# Altium PCB 电机控制器.PcbDoc (part 2 of 2)
Units mm, origin at the board's own origin, x right, y up, seen from the top; angles counter-clockwise.
Board outline 79.76 x 65.02 mm, 2 copper layers (Top Layer, Bottom Layer); 52 components, 84 nets, 215 pads, 18 vias.
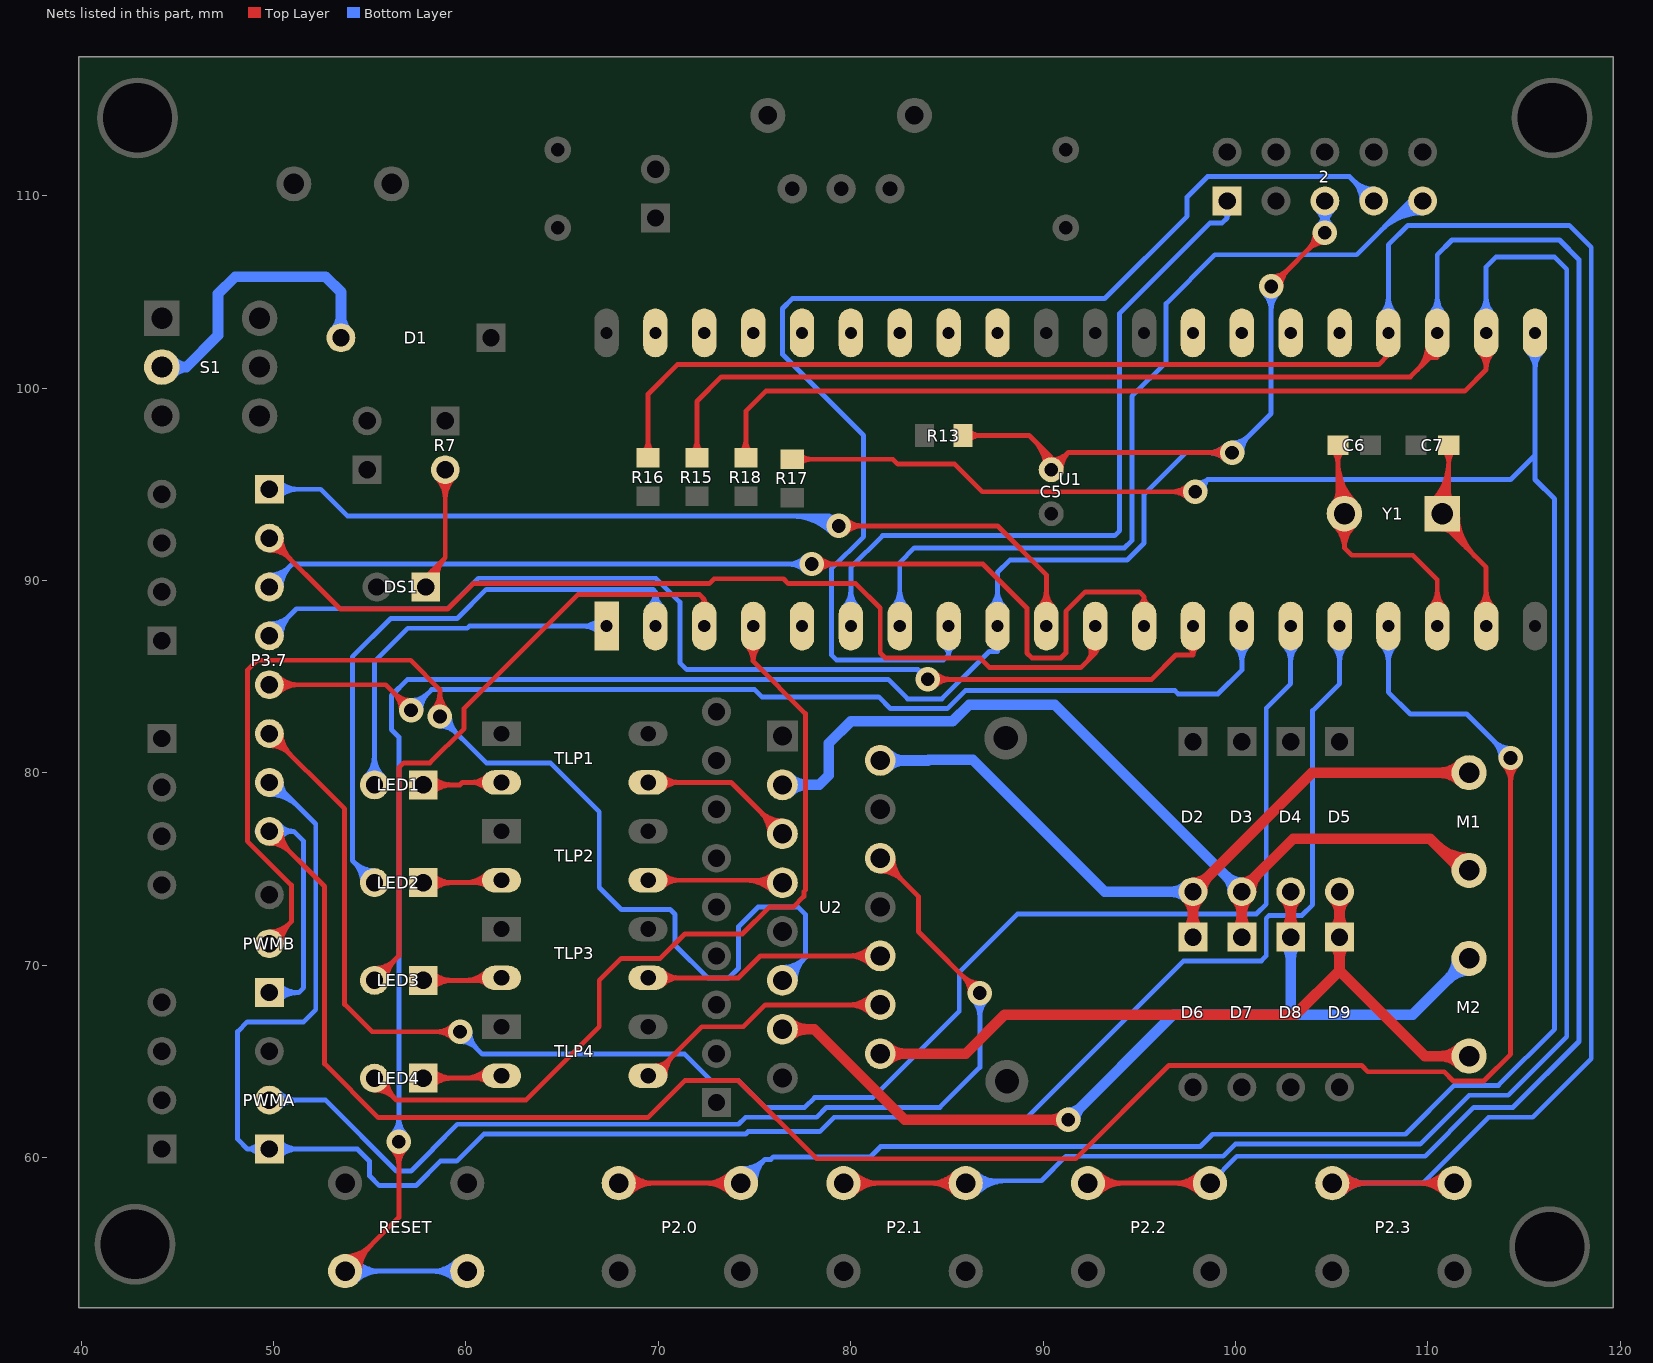
[diagram p2: the nets of this part, all layers, seen from the top]

## Via types
v1: diameter 1.27, hole 0.711, Top Layer to Bottom Layer, 18 vias

## Nets (pads, with @x,y where several pads share a name; then routed paths per layer and width w, separated by ;. In a path a pad name is that pad's centre, name@x,y a point inside that pad or via, vN(x,y) a via of type N, cw(c..) or ccw(c..) an arc to the next point about the centre after c; other vN are vias at no path point) (continued)
Net2_5: 2.5 C5.2 R13.1 RESET.1@53.721,54.102 RESET.2@60.071,54.102 U1.9 | length 167.4
  Top Layer w0.254: RESET.1@53.721,54.102 56.515,56.896 v1(56.515,60.833) ; RESET.1@53.721,54.61 ccw(c53.721,55.836) 54.588,54.969 ccw(c55.455,54.102) RESET.1@54.229,54.102 ; RESET.1@53.721,54.864 ccw(c53.721,56.704) 55.022,55.403 ccw(c56.323,54.102) RESET.1@54.483,54.102 ; v1@56.156,60.474 cw(c55.289,59.607) 56.515,59.607 cw(c57.741,59.607) v1@56.874,60.474 ; R13.1@85.836,97.536 89.281,97.536 90.424,96.393 C5.2@90.424,95.758 91.313,96.647 ; R13.1@86.1,97.272 cw(c86.736,96.636) 86.736,97.536 cw(c86.736,98.436) R13.1@86.1,97.8 ; 89.516,97.301 cw(c87.973,95.758) C5.2@90.155,95.758 ; 89.949,96.868 cw(c88.84,95.758) C5.2@90.409,95.758 ; 90.383,96.434 cw(c89.707,95.758) C5.2@90.663,95.758 ; C5.2@90.426,96.281 ccw(c90.429,97.53) 91.313,96.647 ; C5.2@90.947,95.76 cw(c92.196,95.763) 91.313,96.647 ; v1@99.463,96.288 ccw(c98.596,95.421) 98.596,96.647 ccw(c98.596,97.873) v1@99.463,97.006 ; v1(99.822,96.647) 91.313,96.647 ; v1(101.854,105.283) v1(104.648,108.077) ; v1@101.854,105.791 ccw(c101.854,107.017) 102.721,106.15 ccw(c103.588,105.283) v1@102.362,105.283 ; v1@104.14,108.077 cw(c102.914,108.077) 103.781,107.21 cw(c104.648,106.343) v1@104.648,107.569
  Bottom Layer w0.254: RESET.1@53.721,54.102 RESET.2@60.071,54.102 ; RESET.1@54.08,53.743 cw(c54.947,52.876) 54.947,54.102 cw(c54.947,55.328) RESET.1@54.08,54.461 ; RESET.1@54.26,53.563 cw(c55.561,52.262) 55.561,54.102 cw(c55.561,55.942) RESET.1@54.26,54.641 ; v1@56.156,61.192 ccw(c55.289,62.059) 56.515,62.059 ccw(c57.741,62.059) v1@56.874,61.192 ; v1(56.515,60.833) 56.515,81.864 56.134,82.245 56.134,84.023 56.972,84.861 81.942,84.861 82.958,83.845 84.739,83.845 87.202,86.309 87.63,86.309 ; RESET.2@59.532,53.563 ccw(c58.231,52.262) 58.231,54.102 ccw(c58.231,55.942) RESET.2@59.532,54.641 ; RESET.2@59.712,53.743 ccw(c58.845,52.876) 58.845,54.102 ccw(c58.845,55.328) RESET.2@59.712,54.461 ; U1.9@87.271,88.624 ccw(c86.404,89.491) 87.63,89.491 ccw(c88.856,89.491) U1.9@87.989,88.624 ; v1@99.463,96.288 ccw(c98.596,95.421) 98.596,96.647 ccw(c98.596,97.873) v1@99.463,97.006 ; v1@99.822,97.155 ccw(c99.822,98.381) 100.689,97.514 ccw(c101.556,96.647) v1@100.33,96.647 ; v1@101.495,104.924 cw(c100.628,104.057) 101.854,104.057 cw(c103.08,104.057) v1@102.213,104.924 ; v1(101.854,105.283) 101.854,98.679 v1(99.822,96.647) 97.409,96.647 95.25,94.488 95.25,91.948 94.361,91.059 88.265,91.059 87.63,90.424 U1.9@87.63,87.63 87.63,86.309 ; 2.5@104.207,109.287 cw(c103.144,108.224) 104.648,108.224 cw(c106.152,108.224) 2.5@105.089,109.287 ; v1@104.289,108.436 ccw(c103.422,109.303) 104.648,109.303 ccw(c105.874,109.303) v1@105.007,108.436 ; 2.5@104.387,109.467 cw(c103.757,108.837) 104.648,108.837 cw(c105.539,108.837) 2.5@104.909,109.467 ; v1(104.648,108.077) 2.5@104.648,109.728 ; 87.63,86.309 cw(c87.839,86.309) 87.778,86.509 ccw(c87.839,86.309) 87.63,86.309 ; 87.63,86.309 ccw(c87.421,86.309) 87.482,86.509 cw(c87.421,86.309) 87.63,86.309
Net*1_1: 
Net*1_2: 
Net*1_3: 
Net*1_4: 
Net*1_5: 
Net*1_6: 
Net*1_7: 
Net*1_8: 
Net*1_9: 
Net*1_10: 
Net*1_11: 
Net*1_12: 
NetC6_1: C6.1 U1.18 Y1.2 | length 28.7
  Top Layer w0.254: C6.1@105.058,96.764 cw(c104.422,96.128) 105.322,96.128 cw(c106.223,96.128) C6.1@105.586,96.764 ; Y1.2@105.1,94.036 ccw(c104.563,94.573) 105.322,94.573 ; Y1.2@105.134,92.876 cw(c104.082,91.694) 105.664,91.694 ; Y1.2@105.302,93.066 cw(c104.586,92.26) 105.664,92.26 cw(c106.742,92.26) Y1.2@106.026,93.066 ; 105.322,94.385 ccw(c106.577,94.385) Y1.2@105.689,93.497 ; 105.322,94.998 ccw(c107.19,94.998) Y1.2@105.869,93.677 ; 105.322,95.611 ccw(c107.803,95.611) Y1.2@106.049,93.857 ; 105.322,96.224 ccw(c108.416,96.224) Y1.2@106.228,94.036 ; C6.1@105.322,97.028 105.322,93.56 Y1.2@105.537,93.345 ; Y1.2@105.664,93.472 105.664,91.694 ; Y1.2@106.194,92.876 ccw(c107.246,91.694) 105.664,91.694 ; U1.18@110.131,88.624 ccw(c109.264,89.491) 110.49,89.491 ccw(c111.716,89.491) U1.18@110.849,88.624 ; U1.18@110.49,87.63 110.49,90.043 109.22,91.313 106.045,91.313 105.664,91.694
NetC7_1: C7.1 U1.19 Y1.1 | length 28.8
  Top Layer w0.254: Y1.1@110.18,94.036 ccw(c107.992,96.224) 111.086,96.224 ; Y1.1@110.359,93.857 ccw(c108.605,95.611) 111.086,95.611 ; Y1.1@110.539,93.677 ccw(c109.218,94.998) 111.086,94.998 ; Y1.1@110.719,93.497 ccw(c109.831,94.385) Y1.1@111.086,94.385 ; Y1.1@110.744,92.674 cw(c110.744,91.974) 111.239,92.469 ; Y1.1@110.78,93.472 ccw(c112.093,93.472) 111.165,92.543 ; C7.1@110.822,96.764 cw(c110.185,96.128) 111.086,96.128 cw(c111.986,96.128) C7.1@111.35,96.764 ; Y1.1@111.034,93.472 ccw(c112.961,93.472) 111.598,92.11 ; 111.086,94.573 ccw(c111.845,94.573) Y1.1@111.308,94.036 ; C7.1@111.086,97.028 111.086,93.814 Y1.1@110.744,93.472 110.744,92.964 113.03,90.678 U1.19@113.03,87.63 ; Y1.1@111.288,93.472 ccw(c113.828,93.472) 112.032,91.676 ; Y1.1@111.542,93.472 ccw(c114.695,93.472) 112.465,91.243 ; U1.19@112.671,88.624 ccw(c111.804,89.491) 113.03,89.491 ccw(c114.256,89.491) U1.19@113.389,88.624
NetD1_1: D1.1 S1.2 | length 18.8
  Bottom Layer w0.554: S1.2@44.196,101.092 45.466,101.092 ; S1.2@44.721,100.712 cw(c45.466,100.172) 45.466,101.092 ; S1.2@44.721,101.472 ccw(c45.466,102.012) 45.466,101.092 ; D1.1@53.17,102.95 ccw(c52.362,103.758) 53.504,103.758 ccw(c54.646,103.758) D1.1@53.838,102.95 ; D1.1@53.504,102.616 53.504,104.992 52.705,105.791 48.006,105.791 47.117,104.902 47.117,102.743 45.466,101.092
NetD2_1: D2.1 D6.2 M1.1 U2.2 | length 49.9
  Top Layer w0.554: D6.2@97.456,71.798 ccw(c96.648,72.606) 97.79,72.606 ccw(c98.932,72.606) D6.2@98.124,71.798 ; D2.1@97.456,73.49 cw(c96.648,72.682) 97.79,72.682 cw(c98.932,72.682) D2.1@98.124,73.49 ; D6.2@97.79,71.464 D2.1@97.79,73.824 103.976,80.01 M1.1@112.141,80.01 ; D2.1@97.79,74.297 ccw(c97.79,75.439) 98.597,74.631 ccw(c99.405,73.824) D2.1@98.263,73.824 ; M1.1@111.692,79.561 ccw(c110.608,78.477) 110.608,80.01 ccw(c110.608,81.543) M1.1@111.692,80.459
  Bottom Layer w0.554: U2.2@81.534,80.645 84.015,80.645 84.049,80.678 86.347,80.678 93.202,73.824 D2.1@97.79,73.824 ; U2.2@81.904,80.275 cw(c82.797,79.382) 82.797,80.645 cw(c82.797,81.908) U2.2@81.904,81.015 ; D2.1@97.456,73.49 ccw(c96.648,72.682) 96.648,73.824 ccw(c96.648,74.966) D2.1@97.456,74.158
NetD3_1: D3.1 D7.2 M1.2 U2.3 | length 58.2
  Top Layer w0.554: D7.2@99.996,71.798 ccw(c99.188,72.606) 100.33,72.606 ccw(c101.472,72.606) D7.2@100.664,71.798 ; D3.1@99.996,73.49 cw(c99.188,72.682) 100.33,72.682 cw(c101.472,72.682) D3.1@100.664,73.49 ; D7.2@100.33,71.464 D3.1@100.33,73.824 100.33,73.914 102.997,76.581 110.109,76.581 111.76,74.93 M1.2@112.141,74.93 ; D3.1@100.33,74.297 ccw(c100.33,75.222) 100.984,74.568 ; D3.1@100.803,73.824 cw(c102.162,73.824) 101.201,74.785 ; 110.407,76.283 ccw(c112.141,78.018) M1.2@112.141,75.565 ; 111.326,75.364 cw(c110.893,74.93) M1.2@111.506,74.93
  Bottom Layer w0.554: U2.3@76.454,79.375 78.359,79.375 78.867,79.883 78.867,81.534 80.012,82.679 85.294,82.679 86.156,83.541 90.613,83.541 D3.1@100.33,73.824 ; U2.3@76.824,79.005 cw(c77.717,78.112) 77.717,79.375 cw(c77.717,80.638) U2.3@76.824,79.745 ; D3.1@99.857,73.824 ccw(c98.715,73.824) 99.523,74.631 ccw(c100.33,75.439) D3.1@100.33,74.297
NetD4_1: D4.1 D8.2 M2.1 U2.13 | length 60
  Top Layer w0.554: U2.13@76.454,66.675 78.105,66.675 82.804,61.976 v1(91.313,61.976) ; U2.13@76.824,66.305 cw(c77.717,65.412) 77.717,66.675 cw(c77.717,67.938) U2.13@76.824,67.045 ; v1@91.06,61.723 ccw(c90.449,61.112) 90.449,61.976 ccw(c90.449,62.84) v1@91.06,62.229 ; D8.2@102.536,71.798 ccw(c101.728,72.606) 102.87,72.606 ccw(c104.012,72.606) D8.2@103.204,71.798 ; D4.1@102.536,73.49 cw(c101.728,72.682) 102.87,72.682 cw(c104.012,72.682) D4.1@103.204,73.49 ; D8.2@102.87,71.464 D4.1@102.87,73.824
  Bottom Layer w0.554: v1(91.313,61.976) 96.774,67.437 109.22,67.437 M2.1@112.141,70.358 ; v1@91.313,62.334 ccw(c91.313,63.198) 91.924,62.587 ccw(c92.535,61.976) v1@91.671,61.976 ; D8.2@102.536,71.13 cw(c101.728,70.322) 102.87,70.322 cw(c104.012,70.322) D8.2@103.204,71.13 ; 102.87,67.437 D8.2@102.87,71.464 ; M2.1@111.506,70.358 cw(c109.973,70.358) 111.057,69.274 cw(c112.141,68.19) M2.1@112.141,69.723
NetD5_1: D5.1 D9.2 M2.2 U2.14 | length 48.1
  Top Layer w0.554: U2.14@81.534,65.405 85.979,65.405 88.011,67.437 103.124,67.437 105.41,69.723 ; U2.14@81.904,65.035 cw(c82.797,64.142) 82.797,65.405 cw(c82.797,66.668) U2.14@81.904,65.775 ; D9.2@105.076,71.13 cw(c104.268,70.322) 105.41,70.322 cw(c106.552,70.322) D9.2@105.744,71.13 ; D9.2@105.076,71.798 ccw(c104.268,72.606) 105.41,72.606 ccw(c106.552,72.606) D9.2@105.744,71.798 ; D5.1@105.076,73.49 cw(c104.268,72.682) 105.41,72.682 cw(c106.552,72.682) D5.1@105.744,73.49 ; D5.1@105.41,73.824 D9.2@105.41,71.464 105.41,69.723 ; M2.2@111.692,64.829 ccw(c110.608,63.745) 110.608,65.278 ccw(c110.608,66.811) M2.2@111.692,65.727 ; M2.2@112.141,65.278 109.855,65.278 105.41,69.723
NetDS1_1: DS1.1 R7.2 | length 13.9
  Top Layer w0.254: DS1.1@57.912,89.662 57.912,90.17 58.928,91.186 ; DS1.1@58.024,89.687 cw(c58.918,89.882) 58.271,90.529 ; DS1.1@58.272,89.741 cw(c59.457,90) 58.6,90.858 ; R7.2@58.487,95.317 cw(c57.424,94.254) 58.928,94.254 cw(c60.432,94.254) R7.2@59.369,95.317 ; DS1.1@58.521,89.795 cw(c59.996,90.118) 58.928,91.186 ; R7.2@58.667,95.497 cw(c58.037,94.867) 58.928,94.867 cw(c59.819,94.867) R7.2@59.189,95.497 ; R7.2@58.928,95.758 58.928,91.186
NetLED1_1: LED1.1 TLP1.2 | length 9.8
  Top Layer w0.254: LED1.1@57.785,79.375 59.69,79.375 59.817,79.502 TLP1.2@61.849,79.502 ; LED1.1@58.046,79.114 cw(c58.676,78.484) 58.676,79.375 cw(c58.676,80.266) LED1.1@58.046,79.636 ; LED1.1@58.226,78.934 cw(c59.289,77.871) 59.289,79.375 cw(c59.289,80.879) LED1.1@58.226,79.816 ; TLP1.2@61.109,79.143 ccw(c60.242,78.276) 60.242,79.502 ccw(c60.242,80.728) TLP1.2@61.109,79.861
NetLED2_1: LED2.1 TLP2.2 | length 10.6
  Top Layer w0.254: LED2.1@57.785,74.295 61.722,74.295 TLP2.2@61.849,74.422 ; LED2.1@58.046,74.034 cw(c58.676,73.404) 58.676,74.295 cw(c58.676,75.186) LED2.1@58.046,74.556 ; LED2.1@58.226,73.854 cw(c59.289,72.791) 59.289,74.295 cw(c59.289,75.799) LED2.1@58.226,74.736 ; 59.935,74.295 ccw(c59.935,75.955) TLP2.2@61.109,74.781 ; TLP2.2@61.109,74.063 ccw(c60.548,73.502) 60.548,74.295 ccw(c60.548,75.342) TLP2.2@61.288,74.602
NetLED3_1: LED3.1 TLP3.2 | length 10.6
  Top Layer w0.254: LED3.1@57.785,69.215 61.722,69.215 TLP3.2@61.849,69.342 ; LED3.1@58.046,68.954 cw(c58.676,68.324) 58.676,69.215 cw(c58.676,70.106) LED3.1@58.046,69.476 ; LED3.1@58.226,68.774 cw(c59.289,67.711) 59.289,69.215 cw(c59.289,70.719) LED3.1@58.226,69.656 ; 59.935,69.215 ccw(c59.935,70.875) TLP3.2@61.109,69.701 ; TLP3.2@61.109,68.983 ccw(c60.548,68.422) 60.548,69.215 ccw(c60.548,70.262) TLP3.2@61.288,69.522
NetLED4_1: LED4.1 TLP4.2 | length 10.6
  Top Layer w0.254: LED4.1@57.785,64.135 61.722,64.135 TLP4.2@61.849,64.262 ; LED4.1@58.046,63.874 cw(c58.676,63.244) 58.676,64.135 cw(c58.676,65.026) LED4.1@58.046,64.396 ; LED4.1@58.226,63.694 cw(c59.289,62.631) 59.289,64.135 cw(c59.289,65.639) LED4.1@58.226,64.576 ; 59.935,64.135 ccw(c59.935,65.795) TLP4.2@61.109,64.621 ; TLP4.2@61.109,63.903 ccw(c60.548,63.342) 60.548,64.135 ccw(c60.548,65.182) TLP4.2@61.288,64.442
NetLS1_1: 
NetP5_2: 
NetPWMA1_2: PWMA.2 U2.6 | length 65.5
  Top Layer w0.254: U2.6@81.534,74.892 cw(c81.534,73.267) 82.683,74.416 cw(c83.832,75.565) U2.6@82.207,75.565 ; U2.6@81.534,75.146 cw(c81.534,74.134) 82.249,74.85 cw(c82.965,75.565) U2.6@81.953,75.565 ; U2.6@81.534,75.565 83.515,73.584 83.515,71.755 v1(86.716,68.555) ; v1@86.208,68.555 ccw(c84.981,68.555) 85.848,69.422 ccw(c86.716,70.289) v1@86.716,69.063
  Bottom Layer w0.254: PWMA.2@49.784,62.992 52.705,62.992 56.388,59.309 57.15,59.309 58.293,60.452 58.293,60.476 59.551,61.734 74.168,61.734 74.537,62.103 78.232,62.103 78.74,62.611 84.633,62.611 86.716,64.694 v1(86.716,68.555) ; PWMA.2@50.045,62.731 cw(c50.675,62.101) 50.675,62.992 cw(c50.675,63.883) PWMA.2@50.045,63.253 ; PWMA.2@50.225,62.551 cw(c51.288,61.488) 51.288,62.992 cw(c51.288,64.496) PWMA.2@50.225,63.433 ; v1@86.356,68.195 cw(c85.489,67.328) 86.716,67.328 cw(c87.942,67.328) v1@87.075,68.195
NetPWMB1_2: PWMB.2 U2.11 | length 74.4
  Top Layer w0.254: PWMB.2@49.784,71.12 50.927,72.263 50.927,74.168 48.641,76.454 48.641,85.344 49.149,85.852 57.125,85.852 58.649,84.328 v1(58.649,82.931) ; PWMB.2@49.784,71.489 ccw(c49.784,72.38) 50.414,71.75 ccw(c51.044,71.12) PWMB.2@50.153,71.12 ; PWMB.2@49.784,71.743 ccw(c49.784,73.247) 50.848,72.184 ccw(c51.911,71.12) PWMB.2@50.407,71.12 ; v1@58.289,83.29 ccw(c57.422,84.157) 58.649,84.157 ccw(c59.875,84.157) v1@59.008,83.29
  Bottom Layer w0.254: v1@58.649,82.423 cw(c58.649,81.197) 59.516,82.064 cw(c60.383,82.931) v1@59.157,82.931 ; v1(58.649,82.931) 61.062,80.518 64.389,80.518 66.929,77.978 66.929,74.041 68.072,72.898 70.612,72.898 70.866,72.644 70.866,71.044 72.568,69.342 73.66,69.342 74.168,69.85 74.168,72.009 75.184,73.025 77.267,73.025 77.648,72.644 77.648,70.409 U2.11@76.454,69.215 ; U2.11@76.454,69.634 ccw(c76.454,70.646) 77.169,69.93 ccw(c77.885,69.215) U2.11@76.873,69.215 ; U2.11@76.454,69.888 ccw(c76.454,71.513) 77.603,70.364 ccw(c78.752,69.215) U2.11@77.127,69.215
NetQ1_2: 
NetQ2_2: 
NetQ3_2: 
NetQ4_2: 
NetQ5_2: 
NetTLP1_3: TLP1.3 U2.5 | length 14.2
  Top Layer w0.254: TLP1.3@69.469,79.502 73.787,79.502 U2.5@76.454,76.835 ; TLP1.3@70.209,79.143 cw(c71.076,78.276) 71.076,79.502 cw(c71.076,80.728) TLP1.3@70.209,79.861 ; U2.5@75.781,76.835 ccw(c74.156,76.835) 75.305,77.984 ccw(c76.454,79.133) U2.5@76.454,77.508 ; U2.5@76.035,76.835 ccw(c75.023,76.835) 75.739,77.55 ccw(c76.454,78.266) U2.5@76.454,77.254
NetTLP2_3: TLP2.3 U2.7 | length 12.7
  Top Layer w0.254: TLP2.3@69.469,74.422 76.327,74.422 U2.7@76.454,74.295 ; TLP2.3@70.209,74.063 cw(c71.076,73.196) 71.076,74.422 cw(c71.076,75.648) TLP2.3@70.209,74.781 ; 74.523,74.422 cw(c74.523,72.364) U2.7@75.978,73.819 ; U2.7@75.978,74.771 cw(c75.136,75.613) 75.136,74.422 cw(c75.136,72.977) U2.7@76.158,73.999
NetTLP3_3: TLP3.3 U2.10 | length 18.6
  Top Layer w0.254: TLP3.3@69.469,69.342 74.168,69.342 75.311,70.485 U2.10@81.534,70.485 ; TLP3.3@70.209,68.983 cw(c71.076,68.116) 71.076,69.342 cw(c71.076,70.568) TLP3.3@70.209,69.701 ; U2.10@81.058,70.009 ccw(c79.909,68.86) 79.909,70.485 ccw(c79.909,72.11) U2.10@81.058,70.961 ; U2.10@81.238,70.189 ccw(c80.522,69.473) 80.522,70.485 ccw(c80.522,71.497) U2.10@81.238,70.781
NetTLP4_3: TLP4.3 U2.12 | length 20.4
  Top Layer w0.254: TLP4.3@69.469,64.262 69.723,64.262 72.263,66.802 74.422,66.802 75.565,67.945 U2.12@81.534,67.945 ; TLP4.3@69.85,64.77 ccw(c69.85,65.69) 70.5,65.039 ; TLP4.3@70.104,64.262 cw(c71.024,64.262) 70.373,64.912 ; TLP4.3@70.358,64.262 cw(c71.891,64.262) 70.807,65.346 ; U2.12@81.058,67.469 ccw(c79.909,66.32) 79.909,67.945 ccw(c79.909,69.57) U2.12@81.058,68.421 ; U2.12@81.238,67.649 ccw(c80.522,66.933) 80.522,67.945 ccw(c80.522,68.957) U2.12@81.238,68.241
P0.0: U1.39
P0.1: U1.38
P0.2: U1.37
P0.3: U1.36
P0.4: U1.35
P0.5: U1.34
P0.6: U1.33
P0.7: U1.32
P1.0: LED1.2 U1.1 | length 24.9
  Bottom Layer w0.254: LED1.2@54.804,79.816 ccw(c53.741,80.879) 55.245,80.879 ccw(c56.749,80.879) LED1.2@55.686,79.816 ; LED1.2@54.984,79.636 ccw(c54.354,80.266) 55.245,80.266 ccw(c56.136,80.266) LED1.2@55.506,79.636 ; LED1.2@55.245,79.375 55.245,85.776 56.984,87.515 60.059,87.515 60.174,87.63 U1.1@67.31,87.63 ; U1.1@66.951,87.271 ccw(c66.084,86.404) 66.084,87.63 ccw(c66.084,88.856) U1.1@66.951,87.989
P1.1: LED2.2 U1.2 | length 36.7
  Bottom Layer w0.254: LED2.2@54.622,74.295 ccw(c53.118,74.295) 54.181,75.359 ccw(c55.245,76.422) LED2.2@55.245,74.918 ; LED2.2@54.876,74.295 ccw(c53.985,74.295) 54.615,74.925 ccw(c55.245,75.555) LED2.2@55.245,74.664 ; LED2.2@55.245,74.295 54.102,75.438 54.102,86.03 56.095,88.023 59.551,88.023 61.063,89.535 69.723,89.535 69.85,89.408 ; U1.2@69.51,88.642 ccw(c68.818,89.408) 69.85,89.408 ; U1.2@69.85,87.63 69.85,89.408 ; U1.2@70.19,88.642 cw(c70.882,89.408) 69.85,89.408
P1.2: LED3.2 U1.3 | length 38.8
  Top Layer w0.254: LED3.2@55.245,69.215 56.515,70.485 56.515,80.264 56.769,80.518 58.127,80.518 59.905,82.296 59.905,83.356 65.83,89.281 72.136,89.281 72.39,89.027 ; LED3.2@55.245,69.584 ccw(c55.245,70.475) 55.875,69.845 ccw(c56.505,69.215) LED3.2@55.614,69.215 ; LED3.2@55.245,69.838 ccw(c55.245,71.342) 56.309,70.279 ccw(c57.372,69.215) LED3.2@55.868,69.215 ; U1.3@72.195,88.734 ccw(c72.073,89.027) 72.39,89.027 ; 72.248,89.169 cw(c71.699,88.62) U1.3@72.39,88.265 ; U1.3@72.39,87.63 72.39,89.027 ; U1.3@72.585,88.734 cw(c72.707,89.027) 72.39,89.027
P1.3: LED4.2 U1.4 | length 49.4
  Top Layer w0.254: LED4.2@55.245,63.512 cw(c55.245,62.008) 56.309,63.071 cw(c57.372,64.135) LED4.2@55.868,64.135 ; LED4.2@55.245,63.766 cw(c55.245,62.875) 55.875,63.505 cw(c56.505,64.135) LED4.2@55.614,64.135 ; LED4.2@55.245,64.135 56.388,62.992 63.119,62.992 66.929,66.802 66.929,69.215 68.072,70.358 70.104,70.358 71.374,71.628 74.371,71.628 75.768,73.025 77.013,73.025 77.57,73.582 77.57,73.827 77.648,73.905 77.648,83.083 74.93,85.801 ; U1.4@74.578,86.629 cw(c73.781,85.801) 74.93,85.801 ; U1.4@74.93,87.63 74.93,85.801 ; U1.4@75.282,86.629 ccw(c76.079,85.801) 74.93,85.801
P1.4: U1.5
P1.5: 2.1 U1.6 | length 40.4
  Bottom Layer w0.254: U1.6@79.651,88.624 ccw(c78.784,89.491) 80.01,89.491 ccw(c81.236,89.491) U1.6@80.369,88.624 ; U1.6@80.01,87.63 80.01,90.678 81.661,92.329 93.726,92.329 93.98,92.583 93.98,103.886 98.679,108.585 99.314,108.585 99.568,108.839 ; 2.1@99.355,109.142 cw(c99.245,108.839) 99.568,108.839 ; 2.1@99.568,109.728 99.568,108.839 ; 2.1@99.781,109.142 ccw(c99.891,108.839) 99.568,108.839
P1.6: 2.9 U1.7 | length 53
  Bottom Layer w0.254: U1.7@82.191,88.624 ccw(c81.324,89.491) 82.55,89.491 ccw(c83.776,89.491) U1.7@82.909,88.624 ; U1.7@82.55,87.63 82.55,90.932 83.312,91.694 94.234,91.694 94.615,92.075 94.615,99.568 96.393,101.346 96.393,104.394 98.933,106.934 106.299,106.934 109.093,109.728 2.9@109.728,109.728 ; 107.58,108.215 cw(c109.728,106.068) 2.9@109.728,109.105 ; 108.014,108.649 cw(c109.728,106.935) 2.9@109.728,109.359 ; 108.448,109.083 cw(c109.728,107.802) 2.9@109.728,109.613 ; 108.881,109.516 cw(c109.728,108.67) 2.9@109.728,109.867
P1.7: 2.7 U1.8 | length 67.7
  Bottom Layer w0.254: U1.8@84.843,86.551 cw(c84.61,86.131) 85.09,86.131 ; U1.8@85.09,87.63 85.09,86.131 ; U1.8@85.337,86.551 ccw(c85.57,86.131) 85.09,86.131 ; 2.7@106.565,109.728 ccw(c105.061,109.728) 106.124,110.792 ccw(c107.188,111.855) 2.7@107.188,110.351 ; 2.7@106.819,109.728 ccw(c105.928,109.728) 106.558,110.358 ccw(c107.188,110.988) 2.7@107.188,110.097 ; 2.7@107.188,109.728 105.918,110.998 98.552,110.998 97.485,109.931 97.485,108.941 93.193,104.648 76.962,104.648 76.454,104.14 76.454,101.752 80.67,97.536 80.67,92.278 78.994,90.602 78.994,86.131 79.248,85.877 84.836,85.877 85.09,86.131
P2.0: P2.0.1@67.945,58.674 P2.0.2@74.295,58.674 R17.1 U1.21 | length 149.1
  Top Layer w0.254: P2.0.1@67.945,58.674 P2.0.2@74.295,58.674 ; P2.0.1@68.304,58.315 cw(c69.171,57.448) 69.171,58.674 cw(c69.171,59.9) P2.0.1@68.304,59.033 ; P2.0.1@68.484,58.135 cw(c69.785,56.834) 69.785,58.674 cw(c69.785,60.514) P2.0.1@68.484,59.213 ; P2.0.2@73.756,58.135 ccw(c72.455,56.834) 72.455,58.674 ccw(c72.455,60.514) P2.0.2@73.756,59.213 ; P2.0.2@73.936,58.315 ccw(c73.069,57.448) 73.069,58.674 ccw(c73.069,59.9) P2.0.2@73.936,59.033 ; R17.1@76.962,96.304 82.19,96.304 82.447,96.047 85.411,96.047 86.843,94.615 v1(97.917,94.615) ; R17.1@77.326,96.04 cw(c77.962,95.403) 77.962,96.304 cw(c77.962,97.204) R17.1@77.326,96.568 ; v1@97.558,94.256 ccw(c96.691,93.389) 96.691,94.615 ccw(c96.691,95.841) v1@97.558,94.974
  Bottom Layer w0.254: P2.0.2@74.295,58.674 75.531,59.91 ; P2.0.2@74.314,59.182 ccw(c74.354,60.263) 75.119,59.498 ccw(c75.884,58.733) P2.0.2@74.803,58.693 ; P2.0.2@74.323,59.435 ccw(c74.383,61.058) 75.531,59.91 ; P2.0.2@75.056,58.702 cw(c76.679,58.762) 75.531,59.91 ; v1(97.917,94.615) 98.552,95.25 ; v1@98.04,95.108 ccw(c98.17,95.632) 98.552,95.25 ; v1@98.41,94.738 cw(c98.934,94.868) 98.552,95.25 ; U1.21@115.211,101.876 cw(c114.344,101.009) 115.57,101.009 cw(c116.796,101.009) U1.21@115.929,101.876 ; U1.21@115.57,102.87 115.57,96.52 ; 75.531,59.91 75.855,59.91 75.98,60.035 81.013,60.035 81.557,60.579 98.171,60.579 98.806,61.214 108.839,61.214 111.379,63.754 113.665,63.754 116.586,66.675 116.586,94.234 115.57,95.25 115.57,96.52 ; 98.552,95.25 114.3,95.25 115.57,96.52
P2.1: P2.1.1@79.629,58.674 P2.1.2@85.979,58.674 R18.1 U1.22 | length 153
  Top Layer w0.254: R18.1@74.285,96.641 ccw(c73.649,97.277) 74.549,97.277 ccw(c75.449,97.277) R18.1@74.813,96.641 ; R18.1@74.549,96.377 74.549,98.806 75.588,99.845 111.91,99.845 113.03,100.965 U1.22@113.03,102.87 ; P2.1.1@79.629,58.674 P2.1.2@85.979,58.674 ; P2.1.1@79.988,58.315 cw(c80.855,57.448) 80.855,58.674 cw(c80.855,59.9) P2.1.1@79.988,59.033 ; P2.1.1@80.168,58.135 cw(c81.469,56.834) 81.469,58.674 cw(c81.469,60.514) P2.1.1@80.168,59.213 ; P2.1.2@85.44,58.135 ccw(c84.139,56.834) 84.139,58.674 ccw(c84.139,60.514) P2.1.2@85.44,59.213 ; P2.1.2@85.62,58.315 ccw(c84.753,57.448) 84.753,58.674 ccw(c84.753,59.9) P2.1.2@85.62,59.033 ; U1.22@112.671,101.876 cw(c111.804,101.009) 113.03,101.009 cw(c114.256,101.009) U1.22@113.389,101.876
  Bottom Layer w0.254: P2.1.2@85.979,58.674 86.106,58.674 86.233,58.801 89.916,58.801 91.186,60.071 99.358,60.071 99.993,60.706 109.601,60.706 112.141,63.246 114.173,63.246 117.221,66.294 117.221,106.172 116.586,106.807 113.538,106.807 113.03,106.299 U1.22@113.03,102.87 ; P2.1.2@86.159,58.494 cw(c86.899,57.754) 86.899,58.801 cw(c86.899,59.594) P2.1.2@86.338,59.033 ; P2.1.2@86.338,58.315 cw(c87.512,57.141) 87.512,58.801 cw(c87.512,60.207) P2.1.2@86.518,59.213 ; P2.1.2@86.518,58.135 cw(c88.125,56.528) 88.125,58.801 ; U1.22@112.671,103.864 ccw(c111.804,104.731) 113.03,104.731 ccw(c114.256,104.731) U1.22@113.389,103.864
P2.2: P2.2.1@92.329,58.674 P2.2.2@98.679,58.674 R15.1 U1.23 | length 140.9
  Top Layer w0.254: R15.1@71.745,96.641 ccw(c71.109,97.277) 72.009,97.277 ccw(c72.909,97.277) R15.1@72.273,96.641 ; R15.1@72.009,96.377 72.009,99.314 73.279,100.584 109.093,100.584 110.109,101.6 110.49,101.6 U1.23@110.49,102.87 ; P2.2.1@92.329,58.674 P2.2.2@98.679,58.674 ; P2.2.1@92.688,58.315 cw(c93.555,57.448) 93.555,58.674 cw(c93.555,59.9) P2.2.1@92.688,59.033 ; P2.2.1@92.868,58.135 cw(c94.169,56.834) 94.169,58.674 cw(c94.169,60.514) P2.2.1@92.868,59.213 ; P2.2.2@98.14,58.135 ccw(c96.839,56.834) 96.839,58.674 ccw(c96.839,60.514) P2.2.2@98.14,59.213 ; P2.2.2@98.32,58.315 ccw(c97.453,57.448) 97.453,58.674 ccw(c97.453,59.9) P2.2.2@98.32,59.033 ; 109.443,100.934 ccw(c108.142,102.235) U1.23@109.982,102.235 ; 109.877,101.368 ccw(c109.01,102.235) U1.23@110.236,102.235 ; 110.056,101.547 cw(c110.49,101.114) U1.23@110.49,101.727
  Bottom Layer w0.254: P2.2.2@98.679,58.674 100.076,60.071 109.855,60.071 112.395,62.611 114.427,62.611 117.856,66.04 117.856,106.68 116.84,107.696 111.252,107.696 110.49,106.934 U1.23@110.49,102.87 ; U1.23@110.131,103.864 ccw(c109.264,104.731) 110.49,104.731 ccw(c111.716,104.731) U1.23@110.849,103.864
P2.3: P2.3.1@105.029,58.674 P2.3.2@111.379,58.674 R16.1 U1.24 | length 142.2
  Top Layer w0.254: R16.1@69.205,96.641 ccw(c68.569,97.277) 69.469,97.277 ccw(c70.369,97.277) R16.1@69.733,96.641 ; R16.1@69.469,96.377 69.469,99.695 70.993,101.219 107.442,101.219 107.95,101.727 U1.24@107.95,102.87 ; P2.3.1@105.029,58.674 P2.3.2@111.379,58.674 ; P2.3.1@105.388,58.315 cw(c106.255,57.448) 106.255,58.674 cw(c106.255,59.9) P2.3.1@105.388,59.033 ; P2.3.1@105.568,58.135 cw(c106.869,56.834) 106.869,58.674 cw(c106.869,60.514) P2.3.1@105.568,59.213 ; P2.3.2@110.84,58.135 ccw(c109.539,56.834) 109.539,58.674 ccw(c109.539,60.514) P2.3.2@110.84,59.213 ; P2.3.2@111.02,58.315 ccw(c110.153,57.448) 110.153,58.674 ccw(c110.153,59.9) P2.3.2@111.02,59.033
  Bottom Layer w0.254: P2.3.1@105.029,58.674 109.728,58.674 113.157,62.103 115.443,62.103 118.491,65.151 118.491,107.315 117.348,108.458 108.966,108.458 107.95,107.442 U1.24@107.95,102.87 ; P2.3.1@105.388,58.315 cw(c106.255,57.448) 106.255,58.674 cw(c106.255,59.9) P2.3.1@105.388,59.033 ; P2.3.1@105.568,58.135 cw(c106.869,56.834) 106.869,58.674 cw(c106.869,60.514) P2.3.1@105.568,59.213 ; U1.24@107.591,103.864 ccw(c106.724,104.731) 107.95,104.731 ccw(c109.176,104.731) U1.24@108.309,103.864
P2.4: U1.25
P2.5: U1.26
P2.6: U1.27
P2.7: U1.28
P3.0: P3.7.1 U1.10 | length 59.5
  Top Layer w0.254: v1(79.375,92.837) 87.63,92.837 90.17,90.297 U1.10@90.17,87.63 ; v1@79.734,92.478 cw(c80.601,91.611) 80.601,92.837 cw(c80.601,94.063) v1@79.734,93.196 ; U1.10@89.811,88.624 ccw(c88.944,89.491) 90.17,89.491 ccw(c91.396,89.491) U1.10@90.529,88.624
  Bottom Layer w0.254: P3.7.1@49.784,94.742 52.451,94.742 53.848,93.345 78.867,93.345 ; P3.7.1@50.045,94.481 cw(c50.675,93.851) 50.675,94.742 cw(c50.675,95.633) P3.7.1@50.045,95.003 ; P3.7.1@50.225,94.301 cw(c51.288,93.238) 51.288,94.742 cw(c51.288,96.246) P3.7.1@50.225,95.183 ; 76.922,93.345 cw(c76.922,90.384) v1@79.016,92.478 ; 77.535,93.345 cw(c77.535,90.997) v1@79.195,92.657 ; 78.149,93.345 cw(c78.149,91.611) v1(79.375,92.837) 78.867,93.345 ; 78.762,93.345 cw(c78.762,92.224) v1@79.555,93.017 ; v1@78.917,93.056 ccw(c78.687,93.165) 78.867,93.345 ; v1@79.156,93.295 cw(c79.047,93.525) 78.867,93.345
P3.1: P3.7.2 U1.11 | length 57.2
  Top Layer w0.254: P3.7.2@49.784,91.579 cw(c49.784,90.075) 50.848,91.138 cw(c51.911,92.202) P3.7.2@50.407,92.202 ; P3.7.2@49.784,91.833 cw(c49.784,90.942) 50.414,91.572 cw(c51.044,92.202) P3.7.2@50.153,92.202 ; P3.7.2@49.784,92.202 53.467,88.519 59.055,88.519 60.376,89.84 72.649,89.84 72.898,90.089 76.505,90.089 76.754,89.84 80.264,89.84 81.534,88.57 81.534,86.233 81.788,85.979 86.712,85.979 87.22,85.471 91.948,85.471 92.71,86.233 ; 92.329,85.852 ccw(c91.926,86.255) U1.11@92.341,86.646 ; 92.514,86.037 ccw(c92.116,86.435) U1.11@92.525,86.821 ; U1.11@92.515,86.526 cw(c92.393,86.233) 92.71,86.233 ; 92.699,86.222 ccw(c92.306,86.614) U1.11@92.71,86.995 ; U1.11@92.71,87.63 92.71,86.233 ; U1.11@92.905,86.526 ccw(c93.027,86.233) 92.71,86.233
P3.2: P3.7.3 U1.12 | length 62.4
  Top Layer w0.254: v1(77.978,90.856) 86.868,90.856 89.154,88.57 89.154,86.233 89.408,85.979 90.932,85.979 91.186,86.233 91.186,88.392 92.202,89.408 94.996,89.408 95.25,89.154 ; v1@78.337,90.497 cw(c79.204,89.629) 79.204,90.856 cw(c79.204,92.082) v1@78.337,91.215 ; U1.12@94.992,88.703 ccw(c94.726,89.154) 95.25,89.154 ; U1.12@95.25,87.63 95.25,89.154 ; U1.12@95.508,88.703 cw(c95.774,89.154) 95.25,89.154
  Bottom Layer w0.254: P3.7.3@49.784,89.662 50.978,90.856 v1(77.978,90.856) ; P3.7.3@49.784,90.031 ccw(c49.784,90.922) 50.414,90.292 ccw(c51.044,89.662) P3.7.3@50.153,89.662 ; P3.7.3@49.784,90.285 ccw(c49.784,91.789) 50.848,90.726 ccw(c51.911,89.662) P3.7.3@50.407,89.662 ; v1@77.619,90.497 ccw(c76.752,89.629) 76.752,90.856 ccw(c76.752,92.082) v1@77.619,91.215
P3.3: P3.7.4 U1.13 | length 62.6
  Top Layer w0.254: v1(83.998,84.861) 95.641,84.861 96.911,86.131 97.79,86.131 ; v1@84.357,84.502 cw(c85.224,83.635) 85.224,84.861 cw(c85.224,86.088) v1@84.357,85.221 ; U1.13@97.543,86.551 cw(c97.31,86.131) 97.79,86.131 ; U1.13@97.79,87.63 97.79,86.131 ; U1.13@98.037,86.551 ccw(c98.27,86.131) 97.79,86.131
  Bottom Layer w0.254: P3.7.4@49.784,87.122 51.193,88.531 59.055,88.531 60.643,90.119 69.875,90.119 71.12,88.875 71.12,85.725 71.476,85.369 83.49,85.369 ; P3.7.4@49.784,87.491 ccw(c49.784,88.382) 50.414,87.752 ccw(c51.044,87.122) P3.7.4@50.153,87.122 ; P3.7.4@49.784,87.745 ccw(c49.784,89.249) 50.848,88.186 ccw(c51.911,87.122) P3.7.4@50.407,87.122 ; v1@83.539,85.08 ccw(c83.31,85.19) 83.49,85.369 ; v1@83.779,85.32 cw(c83.669,85.549) 83.49,85.369 ; v1(83.998,84.861) 83.49,85.369
P3.4: P3.7.5 U1.14 | length 64.7
  Top Layer w0.254: P3.7.5@49.784,84.582 55.829,84.582 v1(57.15,83.261) ; P3.7.5@50.045,84.321 cw(c50.675,83.691) 50.675,84.582 cw(c50.675,85.473) P3.7.5@50.045,84.843 ; P3.7.5@50.225,84.141 cw(c51.288,83.078) 51.288,84.582 cw(c51.288,86.086) P3.7.5@50.225,85.023 ; v1@56.642,83.261 ccw(c55.416,83.261) 56.283,84.128 ccw(c57.15,84.996) v1@57.15,83.769
  Bottom Layer w0.254: v1(57.15,83.261) 58.217,84.328 75.006,84.328 75.387,83.947 81.458,83.947 82.067,83.337 85.014,83.337 85.954,84.277 96.849,84.277 97.019,84.107 99.093,84.107 100.33,85.344 U1.14@100.33,87.63 ; v1@57.15,83.769 ccw(c57.15,84.996) 58.017,84.128 ccw(c58.884,83.261) v1@57.658,83.261 ; U1.14@99.971,86.636 cw(c99.104,85.769) 100.33,85.769 cw(c101.556,85.769) U1.14@100.689,86.636
P3.5: P3.7.6 U1.15 | length 95.9
  Top Layer w0.254: P3.7.6@49.784,81.419 cw(c49.784,79.915) 50.848,80.978 cw(c51.911,82.042) P3.7.6@50.407,82.042 ; P3.7.6@49.784,81.673 cw(c49.784,80.782) 50.414,81.412 cw(c51.044,82.042) P3.7.6@50.153,82.042 ; P3.7.6@49.784,82.042 53.696,78.13 53.696,67.97 55.124,66.542 v1(59.696,66.542) ; v1@59.337,66.183 ccw(c58.47,65.315) 58.47,66.542 ccw(c58.47,67.768) v1@59.337,66.901
  Bottom Layer w0.254: v1@59.696,66.034 cw(c59.696,64.807) 60.563,65.675 cw(c61.431,66.542) v1@60.204,66.542 ; v1(59.696,66.542) 60.858,65.38 71.374,65.38 72.746,64.008 74.168,64.008 75.565,62.611 77.615,62.611 78.123,63.119 81.153,63.119 85.641,67.607 85.641,69.633 88.677,72.669 101.092,72.669 101.6,73.177 101.6,83.363 102.87,84.633 U1.15@102.87,87.63 ; U1.15@102.511,86.636 cw(c101.644,85.769) 102.87,85.769 cw(c104.096,85.769) U1.15@103.229,86.636
P3.6: P3.7.7 PWMA.1 U1.16 | length 113.7
  Bottom Layer w0.254: PWMA.1@49.26,60.114 ccw(c48.641,59.715) 48.641,60.452 ; PWMA.1@49.26,60.79 cw(c48.641,61.189) 48.641,60.452 ; P3.7.7@49.784,78.879 cw(c49.784,76.762) 51.281,78.259 ; P3.7.7@49.784,79.121 P3.7.7@49.784,79.502 50.038,79.502 52.197,77.343 52.197,67.691 51.562,67.056 48.641,67.056 48.133,66.548 48.133,60.96 48.641,60.452 ; P3.7.7@49.784,79.133 cw(c49.784,77.629) 50.848,78.692 ; PWMA.1@50.045,60.191 cw(c50.675,59.561) 50.675,60.452 cw(c50.675,61.343) PWMA.1@50.045,60.713 ; PWMA.1@50.225,60.011 cw(c51.288,58.948) 51.288,60.452 cw(c51.288,61.956) PWMA.1@50.225,60.893 ; P3.7.7@50.407,79.502 ccw(c51.298,79.502) 50.668,78.872 ; U1.16@105.051,86.636 cw(c104.184,85.769) 105.41,85.769 cw(c106.636,85.769) U1.16@105.769,86.636 ; U1.16@105.41,87.63 105.41,84.633 104.013,83.236 104.013,73.152 103.456,72.595 101.752,72.595 101.6,72.443 101.6,70.485 101.346,70.231 97.307,70.231 89.179,62.103 79.139,62.103 78.387,61.351 74.664,61.351 74.539,61.226 60.926,61.226 59.517,59.817 58.674,59.817 57.404,58.547 55.499,58.547 54.991,59.055 54.991,59.817 54.356,60.452 48.641,60.452
P3.7: P3.7.8 PWMB.1 U1.17 | length 136.4
  Top Layer w0.254: P3.7.8@49.784,76.339 cw(c49.784,74.835) 50.848,75.898 cw(c51.911,76.962) P3.7.8@50.407,76.962 ; P3.7.8@49.784,76.593 cw(c49.784,75.702) 50.414,76.332 cw(c51.044,76.962) P3.7.8@50.153,76.962 ; P3.7.8@49.784,76.962 52.654,74.092 52.654,64.872 55.448,62.078 69.444,62.078 71.374,64.008 74.168,64.008 78.232,59.944 91.694,59.944 96.545,64.795 106.553,64.795 106.883,64.465 110.846,64.465 111.328,63.983 112.903,63.983 114.3,65.38 v1(114.3,80.772) ; v1@113.941,80.413 cw(c113.074,79.546) 114.3,79.546 cw(c115.526,79.546) v1@114.659,80.413
  Bottom Layer w0.254: P3.7.8@49.149,76.962 51.054,76.962 ; PWMB.1@49.784,68.58 51.308,68.58 51.562,68.834 51.562,76.454 51.054,76.962 ; PWMB.1@50.045,68.319 cw(c50.675,67.689) 50.675,68.58 cw(c50.675,69.471) PWMB.1@50.045,68.841 ; P3.7.8@50.076,76.736 cw(c50.536,76.38) 50.536,76.962 cw(c50.536,77.544) P3.7.8@50.076,77.188 ; PWMB.1@50.225,68.139 cw(c51.288,67.076) 51.288,68.58 cw(c51.288,70.084) PWMB.1@50.225,69.021 ; P3.7.8@50.277,76.581 cw(c51.054,75.979) 51.054,76.962 ; P3.7.8@50.277,77.343 ccw(c51.054,77.945) 51.054,76.962 ; U1.17@107.591,86.636 cw(c106.724,85.769) 107.95,85.769 cw(c109.176,85.769) U1.17@108.309,86.636 ; U1.17@107.95,87.63 107.95,84.201 109.093,83.058 112.014,83.058 v1(114.3,80.772) ; v1@113.792,80.772 ccw(c112.566,80.772) 113.433,81.639 ccw(c114.3,82.506) v1@114.3,81.28
VCC: 
pads on no net: 2.3 LM1.0 S1.3 S1.4 U1.29 U1.30

## Polygon pours and split planes (outlines as drawn)
no net on Top Layer "Top Layer-No Net" (hatched 45Degree grid 0.508 track 0.203, pour order 1000): 40.259,116.84 119.253,116.84 119.253,52.578 40.259,52.578
no net on Bottom Layer "Bottom Layer-No Net" (hatched 45Degree grid 0.508 track 0.203, pour order 1001): 40.259,116.84 119.253,116.84 119.253,52.578 40.259,52.578

## Silkscreen, mask and mechanical layers (free items; w line width, h text height)
Top Overlay:
  lines w0.254: 46.99,81.661 46.99,90.043
  text "Downloads" at 98.552,114.427 h1.52
  text "GND" at 60.706,108.458 h1.52 r90
  text "P3.0" at 47.752,90.678 h1.52 r90
  text "http://www.ourhc.cn" at 118.745,83.82 h1.62 r90
  text "5V" at 48.006,72.771 h1.12 r90
  text "P" at 48.006,71.12 h1.12 r90
  text "P37" at 48.006,67.437 h1.12 r90
  text "5V" at 48.133,64.897 h1.12 r90
  text "P" at 48.133,62.992 h1.12 r90
  text "P36" at 48.133,59.182 h1.12 r90
Mechanical 1:
  lines w0.254: 35.058,115.441 35.56,116.967 ; 35.3,53.719 35.814,52.197 ; 35.306,116.966 35.814,116.968 ; 35.56,52.196 36.068,52.198 ; 35.653,93.368 35.56,116.967 ; 35.721,75.796 35.814,52.197 ; 36.074,115.445 35.56,116.967 ; 36.316,53.723 35.814,52.197 ; 40.005,121.031 40.005,121.539 ; 41.528,120.775 40.005,121.285 ; 41.53,121.791 40.005,121.285 ; 71.097,121.235 40.005,121.285 ; 88.415,121.208 119.507,121.158 ; 117.982,120.652 119.507,121.158 ; 117.984,121.668 119.507,121.158 ; 119.507,120.904 119.507,121.412 ; 39.878,52.197 39.878,117.221 119.634,117.221 119.634,52.197 39.878,52.197
  text "79.5021 (mm)" at 71.35,120.321 h1.52 r359.91
  text "64.7705 (mm)" at 34.739,93.11 h1.52 r270.22

## Text inside footprints (layer, text, board x,y; h text height)
2: Top Overlay "1" at 97.536,109.22 h1.27; Top Overlay "9" at 111.252,109.22 h1.27; Top Overlay "10" at 111.252,111.76 h1.27
U2: Top Overlay "1" at 73.779,82.165 h1.5 r270; Top Overlay "15" at 73.779,65.26 h1.5 r270